# Altium PCB LED_SEQUENCER.PcbDoc
Units mm, origin at the board's own origin, x right, y up, seen from the top; angles counter-clockwise.
Board outline 60 x 23 mm, 2 copper layers (Top Layer, Bottom Layer), stack 1.671 mm thick; 28 components, 26 nets, 77 pads, 14 vias.
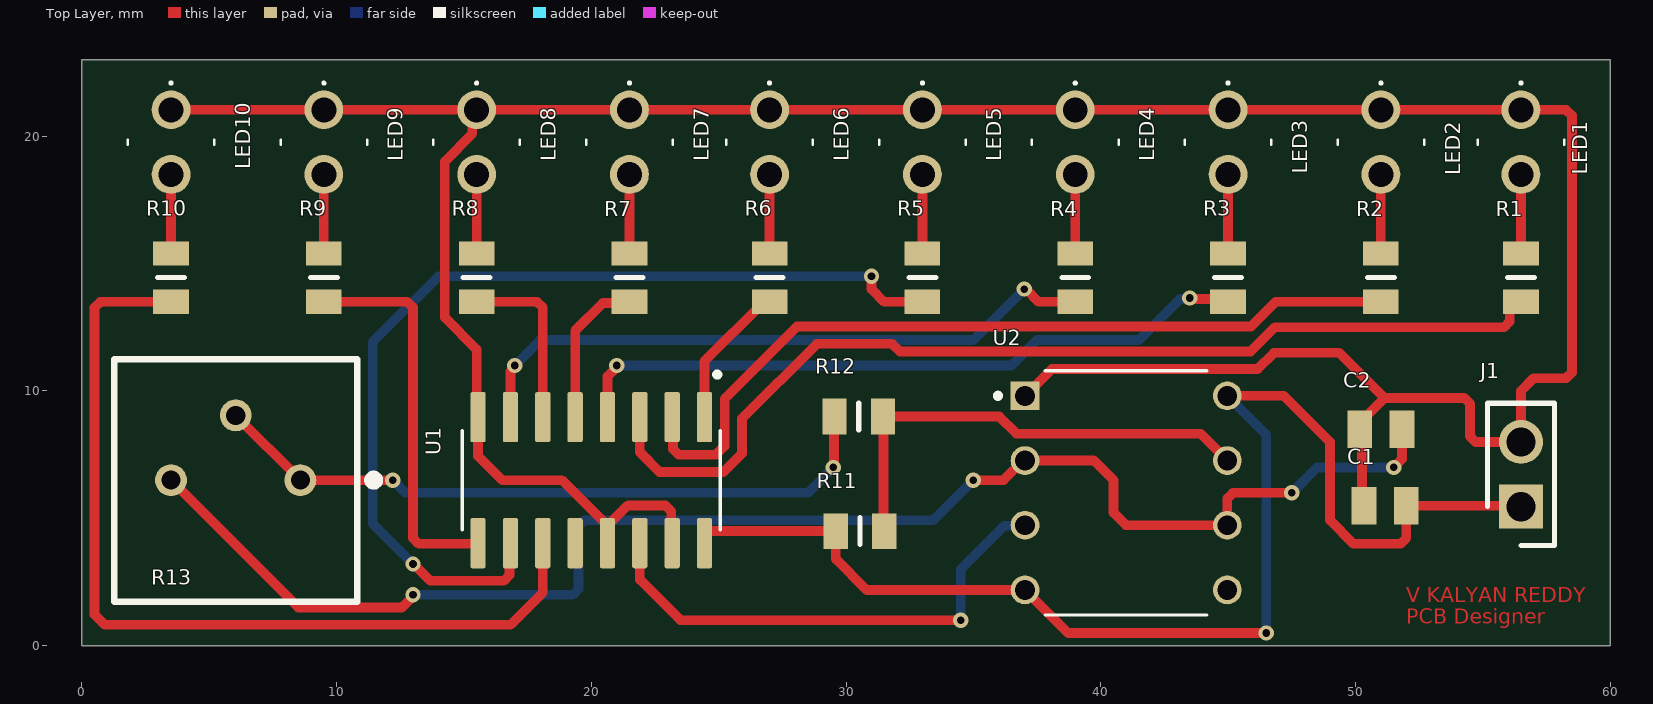
[diagram p0: Top Layer view]
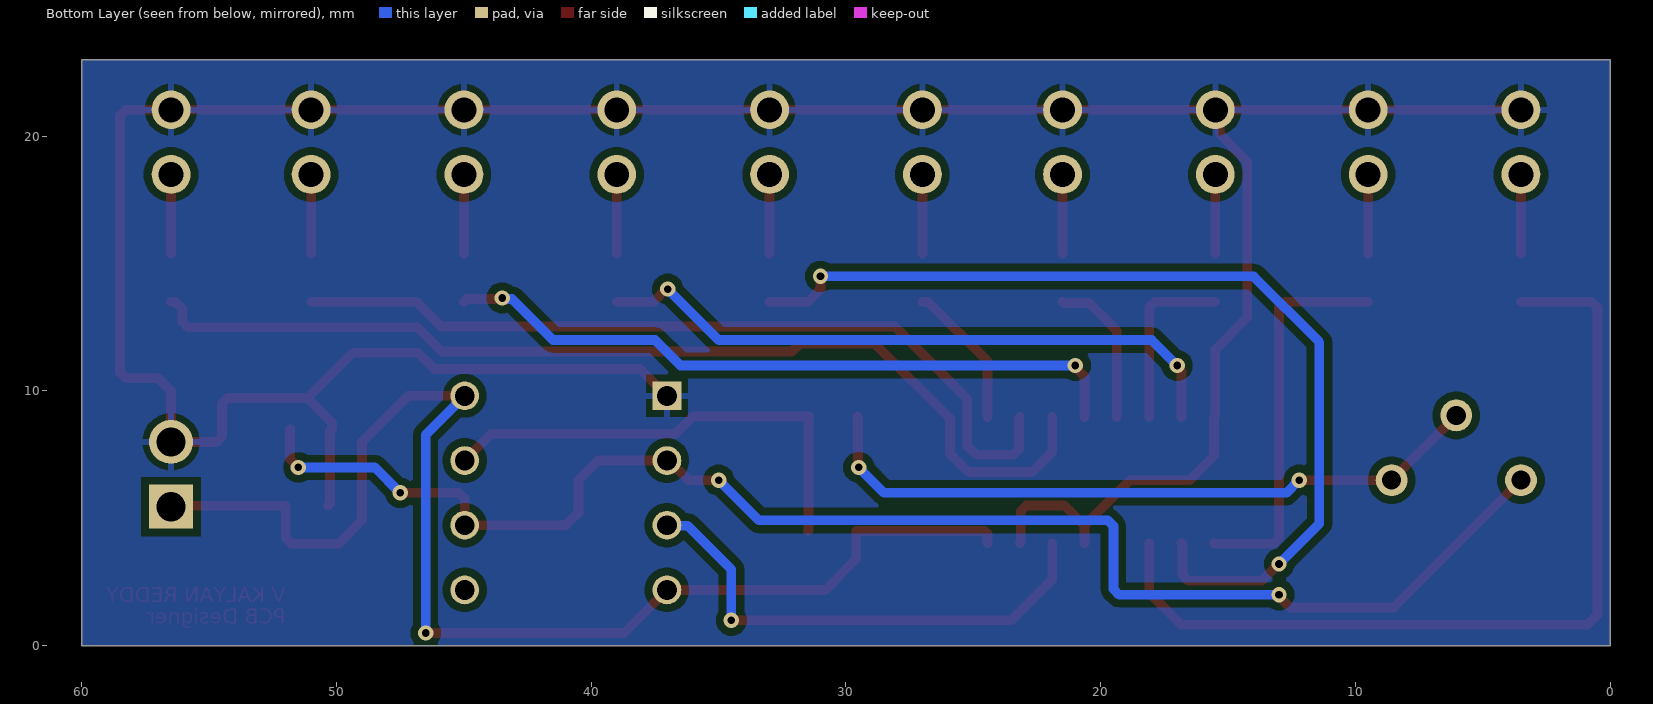
[diagram p1: Bottom Layer view, seen from below]
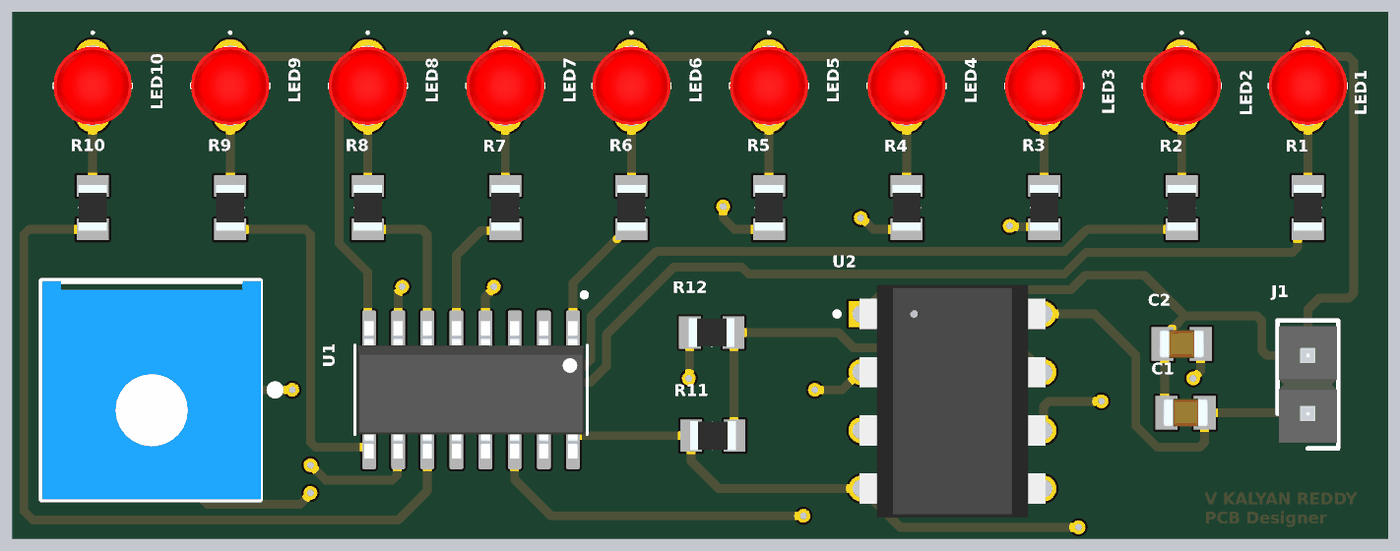
[diagram p2: 3D render of the assembled board from above, using the file's embedded part models]

## Layer stack, top to bottom
Top Solder: solder mask 0.0102, Solder Resist, Dk 3.5
Top Layer: signal copper 0.0356
Dielectric 1: dielectric 1.6, FR-4, Dk 4.8
Bottom Layer: signal copper 0.0356
Bottom Solder: solder mask 0.0102, Solder Resist, Dk 3.5

## Board outline
0,0 60,0 60,23 0,23

## Design rules (kind name [scope] priority, off if disabled: settings)
Clearance [All] p1: gap=0.3 ignorepadtopadclearanceinfootprint=FALSE
PolygonConnect [All] p1: connectstyle=Relief reliefconductorwidth=0.254 reliefentries=4 polygonreliefangle="90 Angle" airgapwidth=0.254
RoutingVias [All] p1: holewidth=0.3 width=0.6 viastyle="Through Hole" minholewidth=0.3 minwidth=0.6 maxholewidth=0.3 maxwidth=0.6
SilkToSolderMaskClearance [IsPad] p1: minsilkscreentomaskgap=0.1 clearancetoexposedcopper=TRUE
SolderMaskExpansion [All] p1: expansion=0.102 istentingtop=FALSE
UnRoutedNet [All] p1: checkbadconnections=TRUE
Width [All] p1: maxlimit=1 minlimit=0.3 preferedwidth=0.5
28 further rules are at their usual default settings.

## Components (designator, comment, footprint, x,y, rotation, side; value= is the part's Value field where it differs from the comment)
C1 "1uf" CAPC2012X145N 51.17,5.5 r0 top
C2 "1uf" CAPC2012X145N 51,8.5 r0 top
J1 "M20-9990246" HDRV2W66P0X254_1X2_508X254X874P 56.5,5.46 r90 top
LED1 "HLMP-1301" HLMP1301 56.5,21.04 r0 top
LED2 "HLMP-1301" HLMP1301 51,21.04 r0 top
LED3 "HLMP-1301" HLMP1301 45,21.04 r0 top
LED4 "HLMP-1301" HLMP1301 39,21.04 r0 top
LED5 "HLMP-1301" HLMP1301 33,21.04 r0 top
LED6 "HLMP-1301" HLMP1301 27,21.04 r0 top
LED7 "HLMP-1301" HLMP1301 21.5,21.04 r0 top
LED8 "HLMP-1301" HLMP1301 15.5,21.04 r0 top
LED9 "HLMP-1301" HLMP1301 9.5,21.04 r0 top
LED10 "HLMP-1301" HLMP1301 3.5,21.04 r0 top
R1 "1k" RESC2012X60N 56.5,14.45 r90 top
R2 "1k" RESC2012X60N 51,14.45 r90 top
R3 "1k" RESC2012X60N 45,14.45 r90 top
R4 "1k" RESC2012X60N 39,14.45 r90 top
R5 "1k" RESC2012X60N 33,14.45 r90 top
R6 "1k" RESC2012X60N 27,14.45 r90 top
R7 "1k" RESC2012X60N 21.5,14.45 r90 top
R8 "1k" RESC2012X60N 15.5,14.45 r90 top
R9 "1k" RESC2012X60N 9.5,14.45 r90 top
R10 "1k" RESC2012X60N 3.5,14.45 r90 top
R11 "2.2k" RESC2012X60N 30.55,4.5 r180 top
R12 "10k" RESC2012X60N 30.5,9 r0 top
R13 "50k" 3386P_1 1.275,1.72 r0 top
U1 "CD4017BM" SOIC127P600X175-16N 20,6.5 r270 top
U2 "NE555P" DIP794W45P254L959H508Q8 41,6 r0 top (schematic designator U??)

## Footprints (in the part's own frame and the unit in brackets; to place one, negate y for a bottom-side part, rotate by r counter-clockwise, add the part's x,y. Pads: shape width x height; smd on the part's side, far side on the other; paste and mask are expansions set on the pad)
3386P_1 [mm]
  round 1.25 hole 0.75: 1(7.305,4.78) 2(4.765,7.32) 3(2.225,4.78)
  silkscreen extent 0,0 10.36,9.53, body extent 0.04,0 9.56,9.53, height 4.76
CAPC2012X145N [mm]
  rect 0.97x1.47 smd: 1(-0.83,0) 2(0.83,0)
  body extent -1,-0.63 1,0.63, height 1.35
DIP794W45P254L959H508Q8 [mm]
  rect 1.13x1.13 hole 0.78: 1(-3.97,3.81)
  round 1.13 hole 0.78: 2(-3.97,1.27) 3(-3.97,-1.27) 4(-3.97,-3.81) 5(3.97,-3.81) 6(3.97,-1.27) 7(3.97,1.27) 8(3.97,3.81)
  silkscreen extent -5.13,-4.79 3.17,4.79, body extent -4.06,-5.08 4.06,5.08, height 5.21
HDRV2W66P0X254_1X2_508X254X874P [mm]
  rect 1.725x1.725 hole 1.15: 1(0,0)
  round 1.725 hole 1.15: 2(2.54,0)
  silkscreen extent -1.52,-1.32 4.06,1.32, body extent -1.27,-1.27 3.81,1.27, height 8.74
HLMP1301 [mil]
  round 60 hole 38.58: 1(0,0) 2(0,-100)
  silkscreen extent -67,-54 67,43, body extent -68,-118 68,18, height 446
RESC2012X60N [mm]
  rect 0.95x1.4 smd: 1(-0.95,0) 2(0.95,0)
  silkscreen extent 0,-0.53 0,0.53, body extent -1,-0.63 1,0.63, height 0.6
SOIC127P600X175-16N [mm]
  rrect25% 1.97x0.6 smd: 1(-2.475,4.445) 2(-2.475,3.175) 3(-2.475,1.905) 4(-2.475,0.635) 5(-2.475,-0.635) 6(-2.475,-1.905) 7(-2.475,-3.175) 8(-2.475,-4.445) 9(2.475,-4.445) 10(2.475,-3.175) 11(2.475,-1.905) 12(2.475,-0.635) 13(2.475,0.635) 14(2.475,1.905) 15(2.475,3.175) 16(2.475,4.445)
  silkscreen extent -4.24,-5.06 1.95,5.06, body extent -3,-4.95 3,4.95, height 1.75

## Part data
C1 C2: library part GRM21BR71H105KA12L, "Capacitor", Manufacturer_Name="Murata Electronics", Mouser Part Number=81-GRM21BR71H105KA2L, Arrow Part Number=GRM21BR71H105KA12L, Arrow Price/Stock=https://www.arrow.com/en/products/grm21br71h105ka12l/murata-manufacturing?region=europe, Datasheet Link=http://www.murata.com/~/media/webrenewal/support/library/catalog/products/capacitor/mlcc/c02e.pdf, Height=1.45mm, Manufacturer_Part_Number=GRM21BR71H105KA12L, Mouser Price/Stock=https://www.mouser.co.uk/ProductDetail/Murata-Electronics/GRM21BR71H105KA12L?qs=Er06SXQpt%252B60EIT%2FJ7%2F41Q%3D%3D
J1: "Connector", Manufacturer_Name=Harwin, Mouser Part Number=855-M20-9990246, Datasheet Link=https://cdn.harwin.com/pdfs/M20-999.pdf, Height=8.74mm, Manufacturer_Part_Number=M20-9990246, Mouser Price/Stock=https://www.mouser.co.uk/ProductDetail/Harwin/M20-9990246?qs=Jph8NoUxIfWjw4WmyRvzag%3D%3D
LED1 LED2 LED3 LED4 LED5 LED6 LED7 LED8 LED9 LED10: "LED", Manufacturer_Name="Avago Technologies", Mouser Part Number=630-HLMP-1301, Arrow Part Number=HLMP-1301, Arrow Price/Stock=https://www.arrow.com/en/products/hlmp-1301/broadcom-limited, Datasheet Link=https://componentsearchengine.com/Datasheets/2/HLMP-1301.pdf, Height=6.35mm, Manufacturer_Part_Number=HLMP-1301, Mouser Price/Stock=https://www.mouser.co.uk/ProductDetail/Broadcom-Avago/HLMP-1301?qs=jT9z6tsiFNkJAuA0Y2YdzA%3D%3D
R1 R2 R3 R4 R5 R6 R7 R8 R9 R10 R11 R12: library part RC0805FR-071KL, "Resistor", Manufacturer_Name=KEMET, Mouser Part Number=603-RC0805FR-071KL, Arrow Part Number=RC0805FR-071KL, Arrow Price/Stock=https://www.arrow.com/en/products/rc0805fr-071kl/yageo?region=nac, Datasheet Link=http://www.yageo.com/documents/recent/PYu-RC_Group_51_RoHS_L_10.pdf, Height=0.6mm, Manufacturer_Part_Number=RC0805FR-071KL, Mouser Price/Stock=https://www.mouser.co.uk/ProductDetail/YAGEO/RC0805FR-071KL?qs=1ogmaHw32WJjeGY0DHXakQ%3D%3D
R13: library part 3386P-1-104LF, "Variable Resistor", Manufacturer_Name=Bourns, Mouser Part Number=652-3386P-1-104LF, Arrow Part Number=3386P-1-104LF, Arrow Price/Stock=https://www.arrow.com/en/products/3386p-1-104lf/bourns?region=nac, Datasheet Link=https://componentsearchengine.com/Datasheets/2/3386P-1-104LF.pdf, Manufacturer_Part_Number=3386P-1-104LF, Mouser Price/Stock=https://www.mouser.co.uk/ProductDetail/Bourns/3386P-1-104LF?qs=m2uG%2FFdTAPVt57WUqvIChw%3D%3D
U1: "CMOS Decade Counter with 10 Decoded Outputs", Package="SOIC-16 Texas Instruments", Availability="In Stock", Check_prices=https://www.snapeda.com/parts/CD4017BM/Texas+Instruments/view-part/?ref=eda, MF="Texas Instruments", MP=CD4017BM, Price=None, Purchase-URL=https://pricing.snapeda.com/search/part/CD4017BM/?ref=eda, SnapEDA_Link=https://www.snapeda.com/parts/CD4017BM/Texas+Instruments/view-part/?ref=snap
U2: Package=None, Availability=Unavailable, MP=NE555P, Price=None

## Via types
v1: diameter 0.6, hole 0.3, Top Layer to Bottom Layer, 14 vias

## Nets (pads, with @x,y where several pads share a name; then routed paths per layer and width w, separated by ;. In a path a pad name is that pad's centre, name@x,y a point inside that pad or via, vN(x,y) a via of type N, cw(c..) or ccw(c..) an arc to the next point about the centre after c; other vN are vias at no path point)
GND: C1.1 C2.1 J1.2 LED1.1 LED2.1 LED3.1 LED4.1 LED5.1 LED6.1 LED7.1 LED8.1 LED9.1 LED10.1 U1.8 U1.13 U1.15 U2.1 | length 122.3
  Top Layer w0.381: LED10.1 LED9.1 LED8.1 ; U1.13 U1.13@20.635,4.71 ; 21.445,5.5 21.425,5.5 U1.13@20.635,4.71 ; 21.446,5.501 22.916,5.501 23.14,5.277 23.14,4.06 U1.15 ; U2.1 38.085,10.866 46.16,10.866 46.795,11.5 49.367,11.5 51.142,9.725 ; C1.1 50.255,5.585 50.255,8.415 C2.1 50.17,8.75 50.855,9.435 50.855,9.438 51.142,9.725 ; LED8.1 15.322,20.862 15.322,20.094 14.248,19.019 14.248,12.884 15.5,11.631 15.5,9.03 U1.8 15.555,7.445 16.5,6.5 18.845,6.5 U1.13@20.635,4.71 ; LED8.1 LED7.1 LED6.1 LED5.1 LED4.1 LED3.1 LED2.1 LED1.1 58.277,21.04 58.5,20.817 58.5,10.723 58.277,10.5 57,10.5 56.5,10 J1.2 54.723,8 54.5,8.223 54.5,9.5 54.274,9.725 51.142,9.725
NetC2_2: C2.2 R13.3 U2.2 U2.6 | length 58.9
  Top Layer w0.381: R13.3 8.5,1.5 12.559,1.5 13,1.941 v1(13,2) ; v1(35,6.5) 36.193,6.5 36.963,7.27 U2.2 39.73,7.27 40.5,6.5 40.5,5.223 40.993,4.73 U2.6 44.97,5.777 45.193,6 v1(47.5,6) ; v1(51.5,7) 51.83,7.33 C2.2
  Bottom Layer w0.381: v1(13,2) 19.277,2 19.5,2.223 19.5,4.701 19.723,4.924 33.424,4.924 v1(35,6.5) ; v1(47.5,6) 48.5,7 v1(51.5,7)
NetLED1_2: LED1.2 R1.2 | length 3.1
  Top Layer w0.381: R1.2 LED1.2
NetLED2_2: LED2.2 R2.2 | length 3.1
  Top Layer w0.381: R2.2 LED2.2
NetLED3_2: LED3.2 R3.2 | length 3.1
  Top Layer w0.381: R3.2 LED3.2
NetLED4_2: LED4.2 R4.2 | length 3.1
  Top Layer w0.381: R4.2 LED4.2
NetLED5_2: LED5.2 R5.2 | length 3.1
  Top Layer w0.381: R5.2 LED5.2
NetLED6_2: LED6.2 R6.2 | length 3.1
  Top Layer w0.381: R6.2 LED6.2
NetLED7_2: LED7.2 R7.2 | length 3.1
  Top Layer w0.381: R7.2 LED7.2
NetLED8_2: LED8.2 R8.2 | length 3.1
  Top Layer w0.381: R8.2 LED8.2
NetLED9_2: LED9.2 R9.2 | length 3.1
  Top Layer w0.381: R9.2 LED9.2
NetLED10_2: LED10.2 R10.2 | length 3.1
  Top Layer w0.381: R10.2 LED10.2
NetR1_1: R1.1 U1.3 | length 40.4
  Top Layer w0.381: U1.3 21.905,7.595 22.682,6.818 25.186,6.818 25.916,7.549 25.916,8.916 28.854,11.854 31.815,11.854 32.122,11.546 45.878,11.546 46.832,12.5 55.832,12.5 56.056,12.723 56.056,13.216 56.34,13.5 R1.1
NetR2_1: R2.1 U1.2 | length 32.7
  Top Layer w0.381: U1.2 23.21,8.94 23.21,7.723 23.433,7.499 24.904,7.499 25.235,7.831 25.235,9.691 28.079,12.535 45.903,12.535 46.869,13.5 R2.1
NetR3_1: R3.1 U1.4 | length 27.3
  Top Layer w0.381: U1.4 20.635,10.576 21,10.941 v1(21,11) ; v1(43.5,13.652) 43.542,13.611 44.889,13.611 R3.1
  Bottom Layer w0.381: v1(21,11) 36.5,11 37.5,12 41.5,12 43.111,13.611 43.458,13.611 v1(43.5,13.652)
NetR4_1: R4.1 U1.7 | length 25.5
  Top Layer w0.381: U1.7 16.825,10.766 17,10.941 v1(17,11) ; v1(37,14) 37.059,14 37.559,13.5 R4.1
  Bottom Layer w0.381: v1(17,11) 18,12 35,12 v1(37,14)
NetR5_1: R5.1 U1.10 | length 38.1
  Top Layer w0.381: v1(13,3.21) 13.021,3.21 13.681,2.549 16.567,2.549 16.79,2.773 16.79,3.99 U1.10 ; v1(31,14.5) 31,14 31.5,13.5 R5.1
  Bottom Layer w0.381: v1(13,3.21) 11.419,4.79 11.419,11.919 14,14.5 v1(31,14.5)
NetR6_1: R6.1 U1.1 | length 5.7
  Top Layer w0.381: U1.1 24.445,11.17 26.775,13.5 R6.1
NetR7_1: R7.1 U1.5 | length 6
  Top Layer w0.381: U1.5 19.365,12.365 20.452,13.452 21.452,13.452 R7.1
NetR8_1: R8.1 U1.6 | length 7
  Top Layer w0.381: R8.1 17.872,13.5 18.095,13.277 U1.6
NetR9_1: R9.1 U1.9 | length 15.3
  Top Layer w0.381: R9.1 12.777,13.5 13,13.277 13,4.223 13.223,4 15.53,4 U1.9
NetR10_1: R10.1 U1.11 | length 35.4
  Top Layer w0.381: R10.1 0.723,13.5 0.5,13.277 0.5,1.223 0.904,0.819 16.819,0.819 18.095,2.095 U1.11
NetR11_1: R11.1 R12.2 U2.7 | length 18.8
  Top Layer w0.381: R11.1 31.475,4.525 31.475,8.975 R12.2 36.016,9 36.691,8.326 43.914,8.326 U2.7
NetR12_1: R12.1 R13.1 R13.2 | length 27.2
  Top Layer w0.381: R13.2 R13.1 v1(12.21,6.5) ; v1(29.5,7) 29.525,7.025 29.525,8.975 R12.1
  Bottom Layer w0.381: v1(12.21,6.5) 12.709,6 28.5,6 v1(29.5,7)
NetU1_14: U1.14 U2.3 | length 19.9
  Top Layer w0.381: U1.14 21.905,2.595 23.5,1 v1(34.5,1)
  Bottom Layer w0.381: v1(34.5,1) 34.5,3 36.207,4.707 37.007,4.707 U2.3
VCC: C1.2 J1.1 R11.2 U1.16 U2.4 U2.8 | length 51.8
  Top Layer w0.381: U1.16 24.445,4.391 24.555,4.5 R11.2 29.6,3.4 30.81,2.19 U2.4 38.72,0.5 v1(46.5,0.5) ; U2.8 47.19,9.81 49,8 49,4.926 49.926,4 51.777,4 52,4.223 C1.2 56.46,5.5 J1.1
  Bottom Layer w0.381: U2.8 46.5,8.28 v1(46.5,0.5)
pads on no net: U1.12 U2.5

## Polygon pours and split planes (outlines as drawn)
GND on Bottom Layer "GND_L02_P002" (solid, pour order 2): 0,0 60,0 60,23 0,23

## Other copper
Top Layer:
  text "V KALYAN REDDY" at 52,1.5 h1
  text "PCB Designer" at 52,0.671 h1